# Altium PCB lcd.PcbDoc
Units mm, origin at the board's own origin, x right, y up, seen from the top; angles counter-clockwise.
Board outline 152.4 x 101.6 mm, 2 copper layers (Top Layer, Bottom Layer); 5 components, 13 nets, 34 pads, 0 vias.
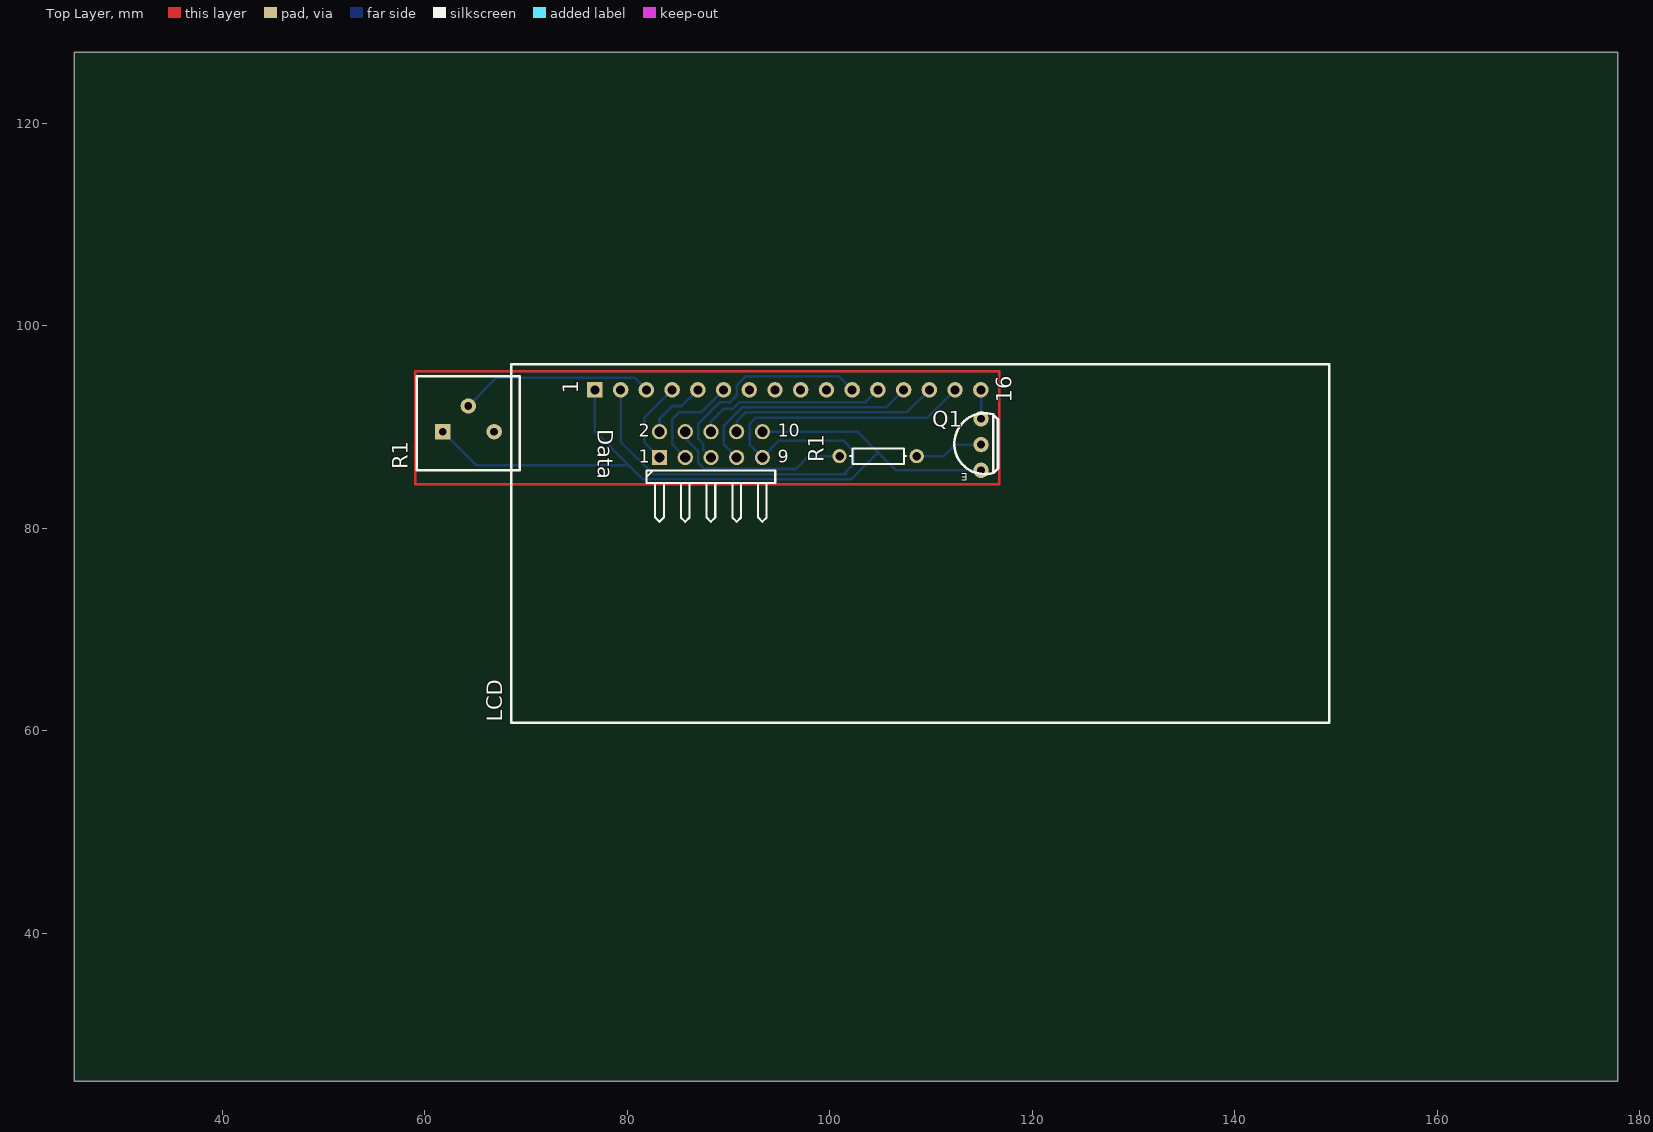
[diagram p0: Top Layer view]
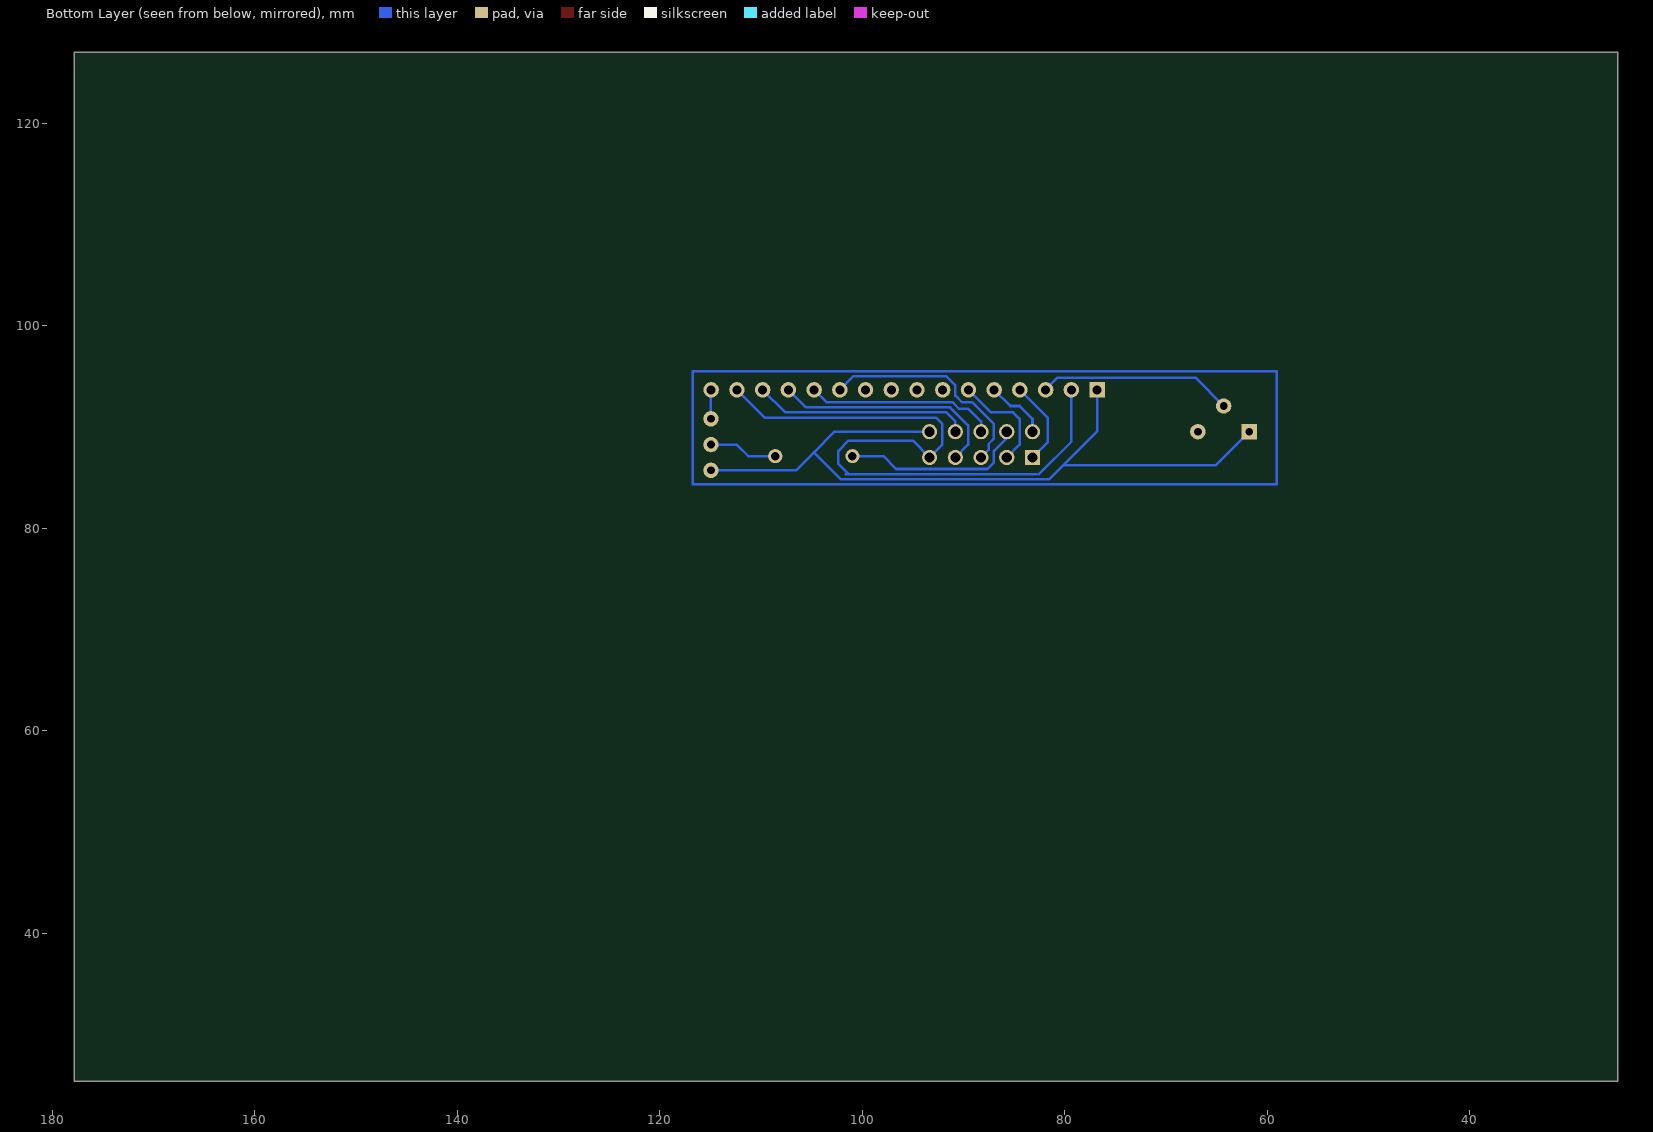
[diagram p1: Bottom Layer view, seen from below]

## Layer stack, top to bottom
Top Solder: solder mask 0.0102, Solder Resist, Dk 3.5
Top Layer: signal copper 0.0356
Dielectric1: dielectric 0.32, FR-4, Dk 4.8
Bottom Layer: signal copper 0.0356
Bottom Solder: solder mask 0.0102, Solder Resist, Dk 3.5

## Board outline
25.4,25.4 177.8,25.4 177.8,127 25.4,127

## Design rules (kind name [scope] priority, off if disabled: settings)
Clearance [All] p1: gap=0.254
PolygonConnect [All] p1: connectstyle=Relief reliefconductorwidth=0.254 reliefentries=4 polygonreliefangle="90 Angle" airgapwidth=0.254
RoomDefinition lcd [InComponentClass('lcd')] p1: confinementstyle=ConfineIn formatcopy=TRUE lockcomponents=FALSE outline 55.626,78.486 121.031,78.486 121.031,100.584 55.626,100.584
RoutingVias [All] p1: holewidth=0.711 width=1.27 viastyle="Through Hole" minholewidth=0.711 minwidth=1.27 maxholewidth=0.711 maxwidth=1.27
SilkToSolderMaskClearance SilkscreenOverComponentPads [IsPad] p1: minsilkscreentomaskgap=0.254 clearancetoexposedcopper=TRUE
SolderMaskExpansion [All] p1: expansion=0.102
Width [All] p1: maxlimit=0.254 minlimit=0.254 preferedwidth=0.254
29 further rules are at their usual default settings.

## Classes and differential pairs
component class lcd: Data LCD Q1 R1

## Components (designator, comment, footprint, x,y, rotation, side; value= is the part's Value field where it differs from the comment)
Data "Header 5X2H" HDR2X5H 83.185,86.995 r0 top
LCD "LCD 16X2" "LCD 16X2" 142.875,148.463 r90 top
Q1 "NPN 222" "NPN (222)" 114.935,88.265 r180 top
R1 "Res1" AXIAL-0.3 104.775,87.122 r180 top
R1 "Trimpot" "Trimpot Duduk" 66.675,92.075 r90 top

## Footprints (in the part's own frame and the unit in brackets; to place one, negate y for a bottom-side part, rotate by r counter-clockwise, add the part's x,y. Pads: shape width x height; smd on the part's side, far side on the other; paste and mask are expansions set on the pad)
AXIAL-0.3 [mm] "Axial Device, Thru-Hole; 2 Leads; 0.3 in Pin Spacing"
  round 1.4 hole 0.85: 1(-3.81,0) 2(3.81,0)
  silkscreen extent -2.77,-0.76 2.77,0.76
HDR2X5H [mm] "Connector; Header; 5x2 Position; Right Angle"
  rect 1.5x1.5 hole 1: 1(0,0)
  round 1.5 hole 1: 2(0,2.54) 3(2.54,0) 4(2.54,2.54) 5(5.08,0) 6(5.08,2.54) 7(7.62,0) 8(7.62,2.54) 9(10.16,0) 10(10.16,2.54)
  silkscreen extent -1.27,-6.35 11.43,-1.27
"LCD 16X2" [mil]
  rect 60x60 hole 35: 1(-2157,2601)
  round 60 hole 35: 2(-2157,2501) 3(-2157,2401) 4(-2157,2301) 5(-2157,2201) 6(-2157,2101) 7(-2157,2001) 8(-2157,1901) 9(-2157,1801) 10(-2157,1701) 11(-2157,1601) 12(-2157,1501) 13(-2157,1401) 14(-2157,1301) 15(-2157,1201) 16(-2157,1101)
  silkscreen extent -3452,-254 -2057,2926
"NPN (222)" [mil]
  round 60 hole 30: 1(0,100) 2(0,0) 3(0,-100)
  silkscreen extent -66,-122 104,115
"Trimpot Duduk" [mil]
  rect 60x60 hole 30: 1(-100,193)
  round 60 hole 30: 2(0,93) 3(-100,-7)
  silkscreen extent -250,-107 115,293

## Part data
Data: "Header, 5-Pin, Dual row, Right Angle"
Q1: library part "NPN (222)"
R1: "Resistor"
R1: library part "Trimpot Duduk"

## Nets (pads, with @x,y where several pads share a name; then routed paths per layer and width w, separated by ;. In a path a pad name is that pad's centre, name@x,y a point inside that pad or via, vN(x,y) a via of type N, cw(c..) or ccw(c..) an arc to the next point about the centre after c; other vN are vias at no path point)
GND: Data.10 LCD.1 Q1.1 R1.1@61.773,89.535 | length 78.3
  Bottom Layer w0.254: R1.1@61.773,89.535 65.102,86.206 80.11,86.206 ; LCD.1 76.81,89.56 81.534,84.836 102.108,84.836 104.775,87.503 ; Data.10 102.743,89.535 104.775,87.503 ; Q1.1@114.935,85.09 114.3,85.725 106.553,85.725 104.775,87.503
NetLCD_3: LCD.3 R1.2@64.313,92.075 | length 19.2
  Bottom Layer w0.254: R1.2@64.313,92.075 67.107,94.869 80.696,94.869 LCD.3
NetLCD_16: LCD.16 Q1.3 | length 2.8
  Bottom Layer w0.254: Q1.3 LCD.16@114.935,93.65
NetQ1_2: Q1.2 R1.1@108.585,87.122 | length 7.1
  Bottom Layer w0.254: R1.1@108.585,87.122 111.252,87.122 112.395,88.265 114.3,88.265 Q1.2@114.935,87.63
PC0: Data.1 LCD.4 | length 8.5
  Bottom Layer w0.254: Data.1 81.661,88.519 81.661,90.907 LCD.4
PC1: Data.2 LCD.5 | length 6.2
  Bottom Layer w0.254: Data.2 83.185,90.805 84.455,92.075 85.369,92.075 LCD.5
PC2: Data.3 LCD.6 | length 10.6
  Bottom Layer w0.254: Data.3 84.455,88.265 84.455,90.805 85.09,91.44 87.274,91.44 LCD.6
PC3: Data.4 R1.2@100.965,87.122 | length 18.3
  Bottom Layer w0.254: Data.4 85.725,88.9 86.995,87.63 86.995,86.487 87.63,85.852 96.647,85.852 97.917,87.122 R1.2@100.965,87.122
PC4: Data.5 LCD.11 | length 22.1
  Bottom Layer w0.254: Data.5 87.503,87.757 87.503,88.348 86.995,88.856 86.995,90.297 89.154,92.456 90.17,92.456 90.805,93.091 90.805,94.107 91.694,94.996 100.889,94.996 LCD.11
PC5: Data.6 LCD.12 | length 18.8
  Bottom Layer w0.254: Data.6 88.265,90.551 89.535,91.821 90.468,91.821 91.103,92.456 103.53,92.456 LCD.12
PC6: Data.7 LCD.13 | length 22.9
  Bottom Layer w0.254: Data.7 89.535,88.265 89.535,90.17 91.313,91.948 105.562,91.948 LCD.13
PC7: Data.8 LCD.14 | length 21.3
  Bottom Layer w0.254: Data.8 90.805,90.551 91.694,91.44 107.594,91.44 LCD.14
VCC: Data.9 LCD.2 LCD.15 | length 66.8
  Bottom Layer w0.254: LCD.2 79.35,88.544 82.55,85.344 ; 82.804,85.344 101.6,85.344 ; 101.346,85.344 102.362,86.36 102.362,87.63 101.346,88.646 94.996,88.646 Data.9 92.075,88.265 92.075,90.297 92.71,90.932 109.626,90.932 LCD.15
pads on no net: LCD.7 LCD.8 LCD.9 LCD.10 R1.3

## Other copper
Multi-Layer:
  lines w0.254: 59.055,84.328 116.713,84.328 116.713,95.504 59.055,95.504 59.055,84.328

## Text inside footprints (layer, text, board x,y; h text height)
Data: Top Overlay "10" at 94.869,89.027 h1.27; Top Overlay "9" at 94.869,86.487 h1.27; Top Overlay "1" at 81.153,86.487 h1.27; Top Overlay "2" at 81.153,89.027 h1.27
LCD: Top Overlay "1" at 75.159,93.294 h1.52 r90; Top Overlay "16" at 117.958,92.405 h1.52 r90
Q1: Top Overlay "E" at 113.614,85.42 h0.76 r180